# Altium PCB NUC972 DEV BOARD-2 20150128.PcbDoc (part 5 of 5)
Units mil, origin at the board's own origin, x right, y up, seen from the top; angles counter-clockwise.
Board outline 10236.22 x 7677.17 mil, 4 copper layers (Top, 2-GND, 3-POWER, Bottom), stack 35.4 mil thick; 572 components, 593 nets, 2369 pads, 1783 vias.
Unrouted connection lines stored in the file: 1277.
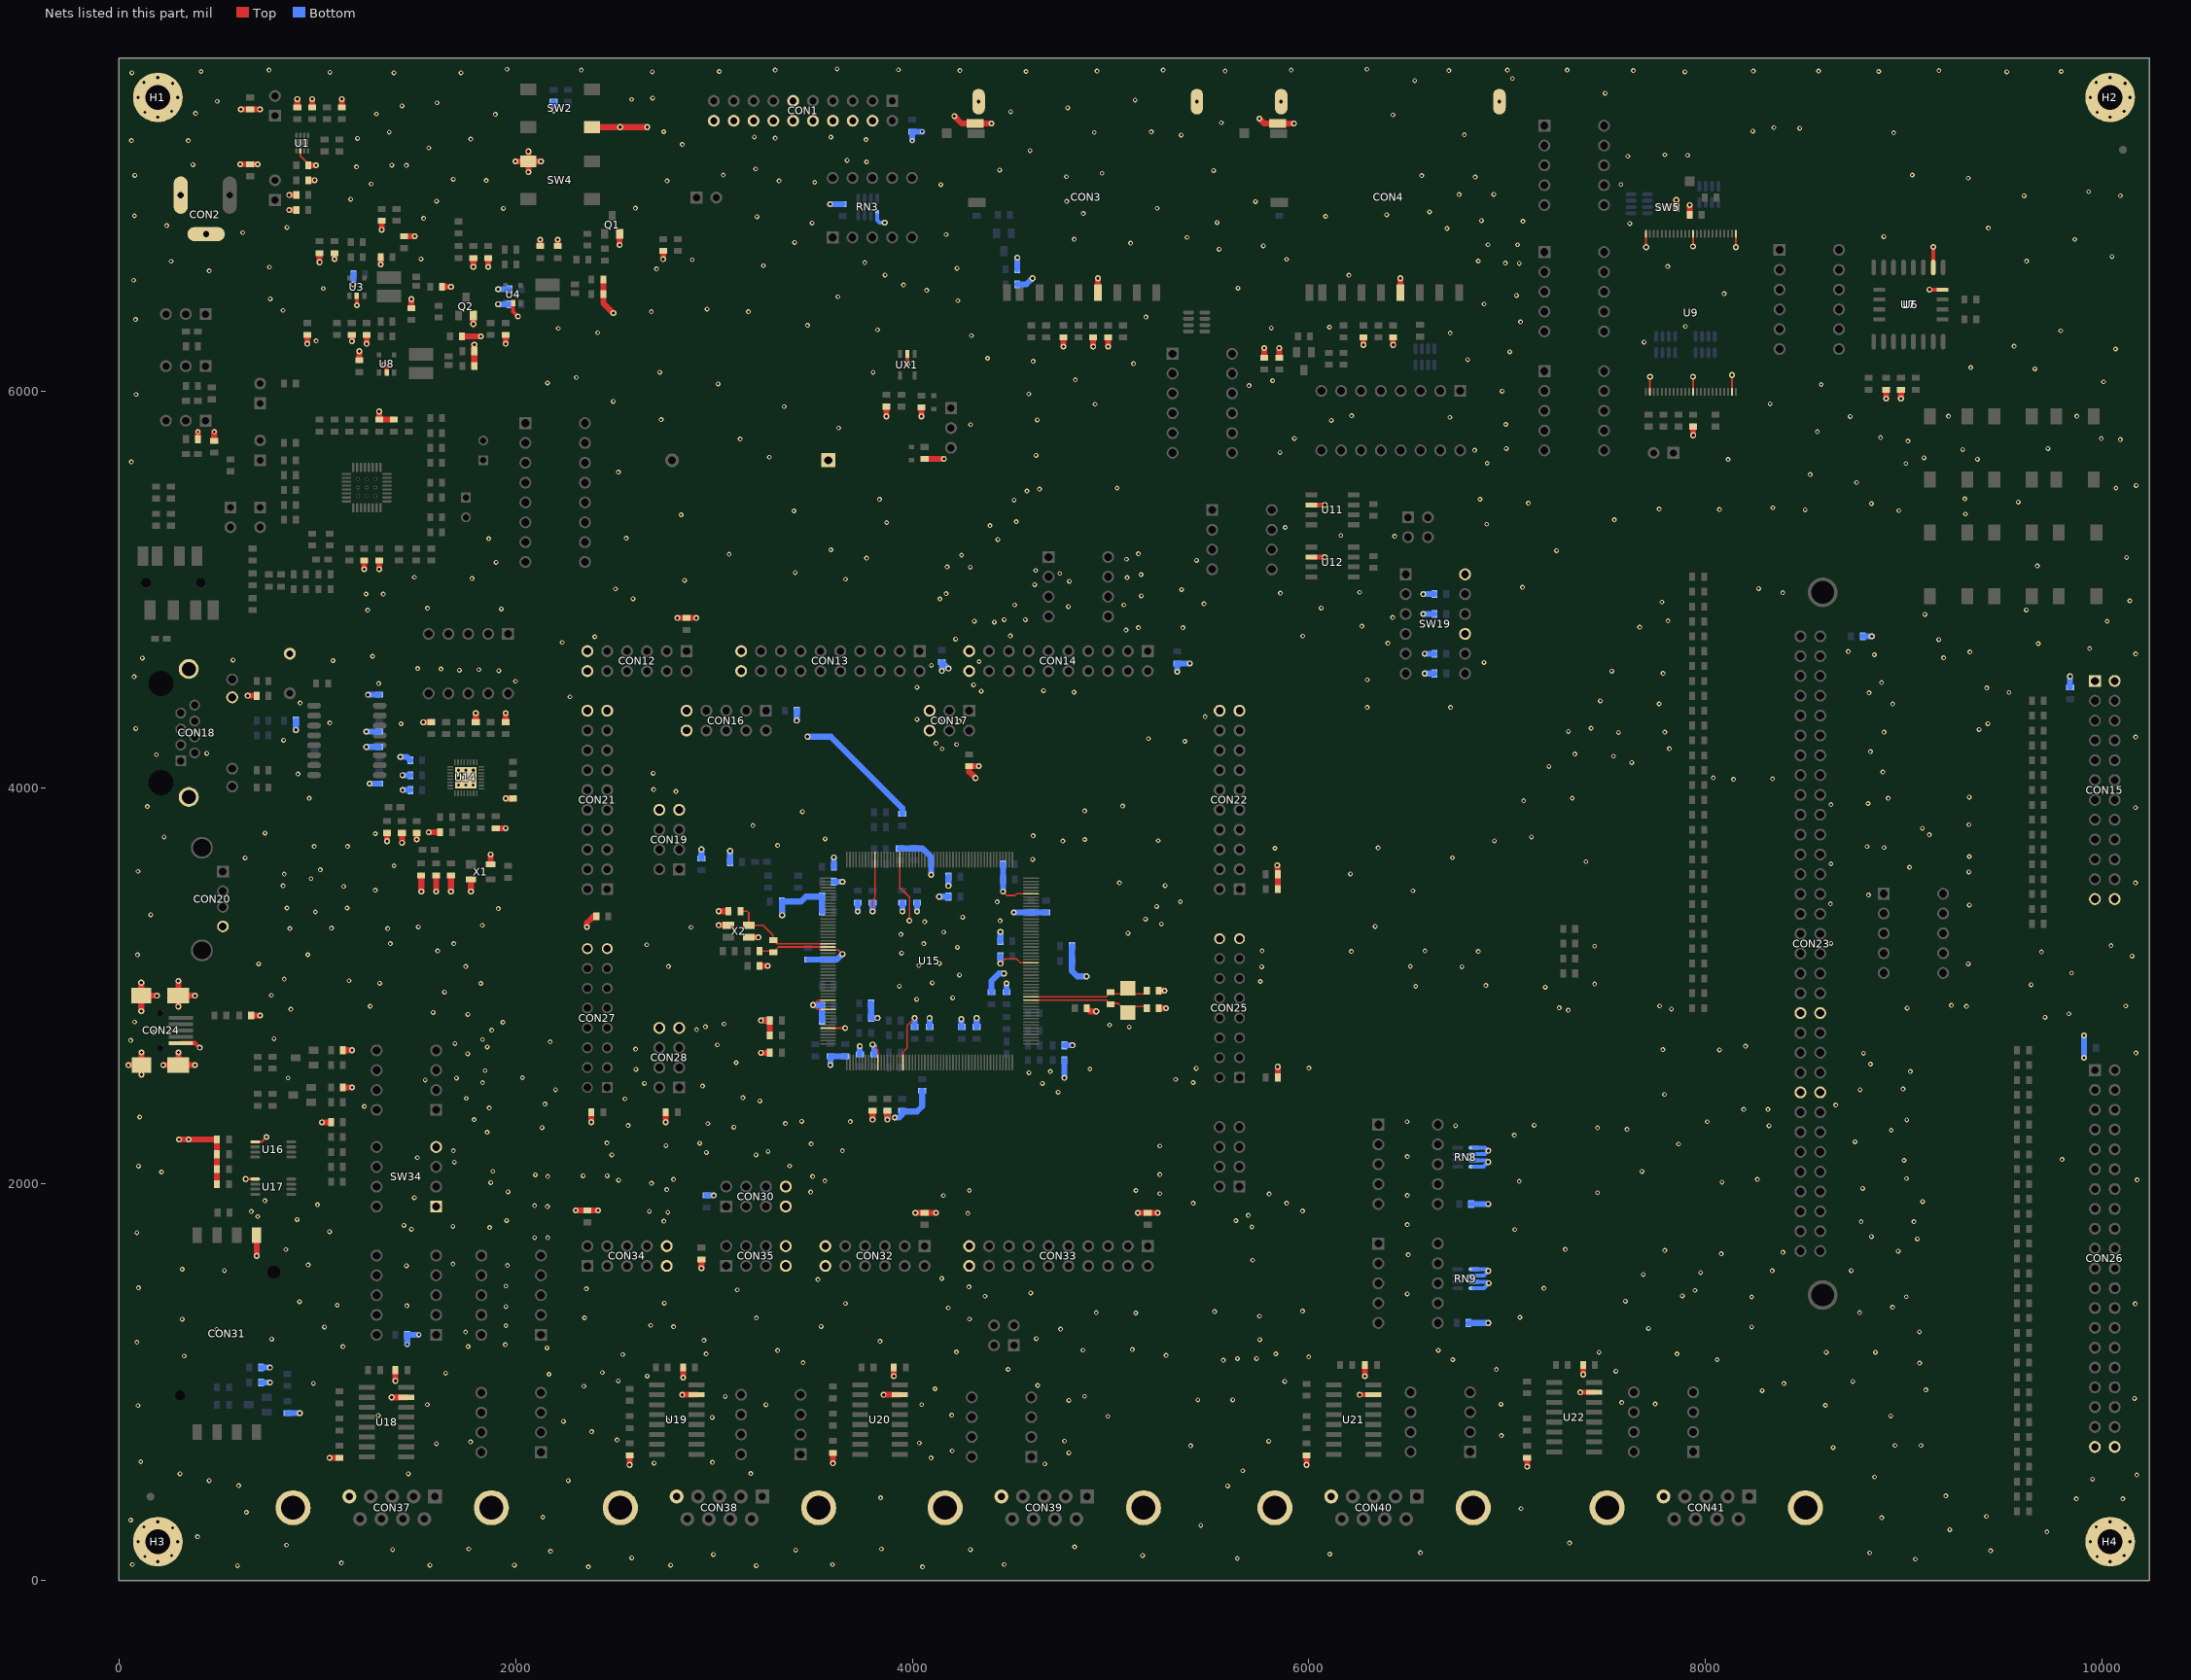
[diagram p7: the nets of this part, all layers, seen from the top]

## Via types
v1: diameter 24, hole 12, Top to Bottom, 1202 vias
v2: diameter 30, hole 16, Top to Bottom, 581 vias

## Nets (pads, with @x,y where several pads share a name; then routed paths per layer and width w, separated by ;. In a path a pad name is that pad's centre, name@x,y a point inside that pad or via, vN(x,y) a via of type N, cw(c..) or ccw(c..) an arc to the next point about the centre after c; other vN are vias at no path point) (continued)
VS: BT1.1 C1.2 C4.1 C5.2 C6.1 C8.2 C9.2 C10.2 C11.2 C12.2 C13.2 C28.2 C29.2 C30.2 C31.2 C32.2 C33.2 C34.2 C35.2 C37.2 C39.2 C41.2 C43.2 C45.2 C56.1 C57.1 C58.1 C59.1 C60.1 C61.2 C62.2 C63.2 C64.2 C65.2 C66.2 CB1.2 CB2.2 CB3.1 CB4.1 CB5.2 CB6.2 CB7.2 CB9.1 CB10.2 CB11.2 CB12.2 CB13.1 CB14.2 CB15.2 CB16.2 CB17.2 CB18.2 CB19.2 CB20.2 CB21.2 CB22.2 CB23.2 CB24.2 CB25.2 CB26.2 CB27.2 CB28.2 CB30.2 CB32.2 CB33.2 CB34.1 CB35.1 CBX1.1 CON1.4 CON1.6 CON1.8 CON1.10 CON1.11 CON1.12 CON1.14 CON1.16 CON1.18 CON1.20 CON2.2 CON2.3 CON3.3 CON3.12 CON3.13 CON3.14 CON4.3 CON4.12 CON4.13 CON4.14 CON12.11 CON12.12 CON13.19 CON13.20 CON14.19 CON14.20 CON15.1 CON15.2 CON15.23 CON15.24 CON16.9 CON16.10 CON17.5 CON17.6 CON18.11 CON18.13 CON18.14 CON19.7 CON19.8 CON20.4 CON21.19 CON21.20 CON22.19 CON22.20 CON23.39 CON23.40 CON23.47 CON23.48 CON24.5 CON24.6 CON24.7 CON24.8 CON24.9 CON25.15 CON25.16 CON26.39 CON26.40 CON27.15 CON27.16 CON28.7 CON28.8 CON30.7 CON30.8 CON31.5 CON32.11 CON32.12 CON33.19 CON33.20 CON34.9 CON34.10 CON35.7 CON35.8 CON37.5 CON37.10 CON37.11 CON38.5 CON38.10 CON38.11 CON39.5 CON39.10 CON39.11 CON40.5 CON40.10 CON40.11 CON41.5 CON41.10 CON41.11 CT1.2 CT2.1 CT3.1 CT4.1 CT5.2 CT6.2 CT7.2 CT8.2 CT10.2 CT11.2 CT12.2 CT13.2 CT14.2 CT15.1 CT17.2 CT18.2 CT19.1 CT20.2 CT23.1 CT29.1 CT30.1 CT31.2 CT32.2 CT33.2 CT34.2 CT35.1 CT36.1 CT37.1 CT38.1 CT39.1 CT40.1 CT41.2 CT42.1 CT43.1 CT44.1 CT45.1 CT46.1 CT47.1 CT48.1 CT49.1 CT50.1 CT51.1 CT52.1 CT54.2 CT55.1 CT56.2 CT57.2 CT60.1 CT62.1 CT63.1 CT64.1 CT65.1 CT66.2 CT68.1 CT69.2 CT70.2 CT71.2 CT72.2 CT76.2 CT77.2 CT78.2 CT79.2 CT80.2 CT81.2 CT82.2 CT83.2 CT84.2 CT85.2 CT86.2 CT87.2 CT88.2 CT91.1 CT92.2 CT94.2 CT95.2 CT96.1 CT97.1 CX1.2 H1.1 H1.2 H1.3 H1.4 H1.5 H1.6 H1.7 H1.8 H1.9 H2.1 H2.2 H2.3 H2.4 H2.5 H2.6 H2.7 H2.8 H2.9 H3.1 H3.2 H3.3 H3.4 H3.5 H3.6 H3.7 H3.8 H3.9 H4.1 H4.2 H4.3 H4.4 H4.5 H4.6 H4.7 H4.8 H4.9 LED2.2 LED7.2 LED9.2 Q1.E Q2.E R1.1 R3.2 R6.1 R9.1 R11.1 R21.1 R30.1 R43.2 R44.2 R56.2 R57.2 R64.2 R65.1 R68.1 R70.1 R77.1 R84.1 R85.2 R86.2 R100.1 R101.2 R102.2 R103.2 R104.2 R108.1 R109.2 R110.2 R111.2 R117.2 R118.2 R119.2 R120.2 RG1.1 RG2.1 RG3.1 RN3.7 RN8.2 RN8.4 RN8.6 RN8.8 RN9.2 RN9.4 RN9.6 RN9.8 RX2.1 SW2.4 SW4.4 SW5.3 SW19.9 SW19.12 SW34.1 SW34.4 U1.2 U3.2 U4.2 U6.4 U7.10 U8.2 U9.2 U9.13 U9.23 U9.25 U9.36 U9.48 U11.2 U12.2 U14.33 U15.11 U15.19 U15.81 U15.103 U15.145 U15.153 U15.186 U15.202 U15.205 U15.211 U16.1 U17.1 U18.15 U19.15 U20.15 U21.15 U22.15 UX1.2 X1.2 X1.4 X2.2 X2.4 | length 18240.2
  Top w8: U15.211@3575.69,2786.42 v2(3662.5,2786.42) ; U15.205@3575.69,2880.91 3522.24,2880.91 v2(3500,2903.15) 3525,2928.15 U15.202@3575.69,2928.15 ; U15.186@3575.69,3180.12 3627.88,3180.12 v2(3648,3160) ; v2(3800,2704) 3827.66,2676.34 U15.11@3827.66,2613.19 ; v2(3800,3375) 3800,3432 3811.91,3443.91 U15.153@3811.91,3636.81 ; U15.145@3937.89,3636.81 3937.89,3496 3985.89,3448 v2(3985.89,3328) ; U15.19@3953.64,2613.19 3953.64,2665.64 3975,2687 3975,2800 v2(4012.5,2837.5) ; v2(4445,3112) 4469,3136 4525.13,3136 4544,3117.13 U15.81@4599.31,3117.13 ; v2(4457.5,3475) 4476.5,3456 4517.42,3456 4525,3463.58 U15.103@4599.31,3463.58
  Top w10: v2(640,2025.5) U17.1@687.5,2025.5 ; U16.1@687.5,2213 720,2213 v2(744,2237) ; U1.2@915.16,7210.63 915.16,7186.5 955,7146.66 CT2.1@955,7137.5 ; v2(7700,6725) U9.48@7700,6792.62 ; U9.2@7719.69,5995.37 v2(7719.69,6072) ; U9.13@7936.22,5995.37 v2(7936.22,6072) ; v2(7936.22,6728) U9.36@7936.22,6792.62 ; U9.23@8133.07,5995.37 v2(8133.07,6080) ; v2(8152.76,6725) U9.25@8152.76,6792.62
  Top w20: CON24.5@312.2,2711.81 384,2711.81 v2(407.81,2688) ; v2(1200,6432) U3.2@1200,6479.97 ; v1(1336,6134) 1350,6120 U8.2@1350,6092.47 ; U4.2@1987.5,6442.47 1987.5,6400 v2(2012.5,6375) ; v2(3975.1,6136) UX1.2@3975.1,6187.5 ; v2(9129,6511) U6.4@9194.5,6511 ; U7.10@9147.5,6622.52 v2(9147.5,6725.5)
  Top w25: U12.2@6012.5,5162.5 v2(6080,5162.5) ; U11.2@6012.5,5425 v2(6080,5425) ; v2(6256,937.5) U21.15@6325,937.5 ; v2(7368,950) U22.15@7437.5,950
  Top w30: v2(48,2599.61) CON24.6@114.17,2599.61 ; v2(113.39,2872) CON24.8@113.39,2950 ; v2(113.39,3016) CON24.8@113.39,2950 ; v2(114.17,2552) CON24.6@114.17,2599.61 ; v2(114.17,2664) CON24.6@114.17,2599.61 ; v2(192,2950) CON24.8@113.39,2950 ; v2(224,2600) CON24.7@300.39,2600 ; v2(300,2896) CON24.9@300,2950 ; v2(300,3024) CON24.9@300,2950 ; v2(300.39,2664) CON24.7@300.39,2600 ; v2(304,2225.5) v2(352,2225.5) CT43.1@495,2225.5 CT44.1@495,2150.5 CT45.1@495,2075.5 CT46.1@495,2000.5 ; v2(384,2600) CON24.7@300.39,2600 ; v2(384,2950) CON24.9@300,2950 ; CT23.1@398.75,5756.25 v1(398.75,5793.75) ; CBX1.1@481.25,5748.75 v1(481.25,5793.75) ; v2(612.5,7142.5) C1.2@662.5,7142.5 v2(700,7142.5) ; v2(616,7420) CT1.2@662.5,7420 v2(712,7420) ; v2(650,4462.5) R64.2@695,4462.5 ; R84.1@667.5,2850 v2(712.5,2850) ; v2(695,1638) CON31.5@695,1742 ; v2(859,6912.5) CT4.1@895,6912.5 ; v2(859,6987.5) CT3.1@895,6987.5 ; CB1.2@900,7430 v2(900,7472) ; v2(950,6237.5) C8.2@950,6282.5 ; R6.1@955,7062.5 v2(987,7062.5) ; CT2.1@955,7137.5 v2(995,7137.5) ; R1.1@975,7430 v2(975,7472) ; v2(1012.5,6649) R9.1@1012.5,6695 ; v2(1024,2312) CT42.1@1070,2312 ; v2(1062.5,620) C56.1@1112.5,620 ; v2(1087.5,6665) C4.1@1087.5,6695 ; R3.2@1125,7430 v2(1125,7472) ; LED9.2@1130,2487.5 v2(1176,2487.5) ; LED7.2@1130,2675 v2(1176,2675) ; v2(1175,6250) C9.2@1175,6282.5 ; C13.2@1212.5,6155 v2(1212.5,6200) ; v2(1237.5,5101) R56.2@1237.5,5145 ; v2(1250,6237.5) R21.1@1250,6282.5 ; v2(1312.5,5101) R57.2@1312.5,5145 ; v2(1312.5,5896) R43.2@1312.5,5855 R44.2@1387.5,5855 ; v2(1320,6637.5) CT7.2@1320,6675 ; v2(1325,6812.5) LED2.2@1325,6857.5 ; v2(1352.5,3729.5) CT31.2@1352.5,3771 ; v2(1376,925) U18.15@1450,925 ; v2(1395,1008) C37.2@1395,1062.5 ; v2(1427.5,3721.5) CB9.1@1427.5,3771 ; CT5.2@1437.5,6780 v2(1492,6780) ; CT13.2@1475,6417.5 v2(1475,6462.5) ; v2(1502.5,3737.5) CT32.2@1502.5,3771 ; CT33.2@1524.5,3557 1525,3557 v2(1525,3475) ; v2(1535,4329.5) R65.1@1575,4330 ; v2(1562.5,3775) C30.2@1620,3775 ; CT34.2@1599.5,3557 1600,3557 v2(1600,3475) ; CT11.2@1630,6525 v2(1675,6525) ; C31.2@1674.5,3557 1675,3557 v2(1675,3475) ; v2(1712.5,4012.5) v2(1749.5,4049.5) ; v2(1712.5,4049.5) v2(1749.5,4049.5) ; v2(1712.5,4086.5) v1(1730,4069) v2(1749.5,4049.5) ; CT14.2@1730,6275 v2(1825,6275) ; v2(1749.5,4012.5) v2(1749.5,4049.5) ; v2(1749.5,4087.5) v2(1749.5,4049.5) ; v2(1775,3475) X1.2@1775,3537.7 ; v2(1786.5,4012.5) v2(1749.5,4049.5) ; v2(1787.4,6337.5) Q2.E@1787.4,6379.72 ; v2(1787.5,4049.5) v2(1749.5,4049.5) ; v2(1787.5,4087.5) v2(1749.5,4049.5) ; v2(1787.5,6625) C5.2@1787.5,6670 ; CT18.2@1792.5,6125 CT17.2@1792.5,6200 v2(1792.5,6233) ; R68.1@1800,4330 v2(1800,4375) ; v2(1862.5,6625) R11.1@1862.5,6670 ; X1.4@1875,3612.5 v2(1875,3662.5) ; R77.1@1900,3795 v2(1950,3795) ; v2(1950,3945) C29.2@1987.5,3945 ; R70.1@1950,4330 v2(1950,4375) ; v2(1950,6237.5) C10.2@1950,6282.5 ; v2(2000,7157.19) SW4.4@2065.16,7157.19 ; v2(2065.16,7104) SW4.4@2065.16,7157.19 ; v2(2065.16,7208) SW4.4@2065.16,7157.19 ; CT6.2@2125,6730 v2(2125,6762.5) ; v2(2128,7157.19) SW4.4@2065.16,7157.19 ; CT8.2@2212.5,6730 v2(2212.5,6762.5) ; v2(2304,1867.5) CT47.1@2362.5,1867.5 v2(2416,1867.5) ; v2(2360,3296) 2360,3318 2392,3350 CT37.1@2407.5,3350 ; v2(2382.5,2312.5) CT39.1@2382.5,2362.5 ; SW2.4@2384.84,7330.31 v2(2528,7330.31) v2(2664,7330.31) ; CT10.2@2442.5,6562.5 CT12.2@2442.5,6487.5 2442.5,6443.75 v2(2493.75,6392.5) ; v2(2524.9,6736) Q1.E@2524.9,6792.22 ; v2(2575,584) C57.1@2575,632.5 ; v2(2744,6664) C6.1@2744,6706 ; v2(2757.5,2312.5) CT40.1@2757.5,2362.5 ; v2(2816,4855) CT29.1@2862.5,4855 v2(2912,4855) ; v2(2840,937.5) U19.15@2912.5,937.5 ; v2(2845,1024) C39.2@2845,1075 ; v2(2937.5,1576) CT50.1@2937.5,1620 ; v2(3024,3305.51) X2.2@3072.83,3305.51 ; v2(3024,3376) C32.2@3074,3376 ; X2.4@3177.17,3244.49 v2(3224,3244.49) ; C33.2@3230,3100 v2(3272,3100) ; v2(3237.5,2662.5) R86.2@3282.5,2662.5 ; v2(3237.5,2825) R85.2@3282.5,2825 CB11.2@3282.5,2750 ; v2(3600,592) C58.1@3600,645 ; v2(3800,2325) CT41.2@3800,2370 ; v2(3856,937.5) U20.15@3937.5,937.5 ; v2(3870.5,5872) RX2.1@3870.5,5920.5 ; v2(3875,2325) CB12.2@3875,2370 ; v2(3907.5,1032) C41.2@3907.5,1075 ; v2(4016,1855) CT48.1@4062.5,1855 v2(4120,1855) ; v2(4046,5872) CX1.2@4046,5916.5 ; CB7.2@4062.5,5657.5 v2(4160,5657.5) ; v2(4212.5,7386.02) 4250,7348.52 CON3.12@4317.22,7348.52 v2(4400,7348.52) ; v2(4319.5,4048) 4287.5,4080 CT30.1@4287.5,4107.5 v2(4336,4107.5) ; v2(4762.5,6224) C11.2@4762.5,6270 ; CB10.2@4880,2887.5 4896,2871.5 v2(4928,2871.5) ; v2(4912.5,6224) CB3.1@4912.5,6270 ; CON3.3@4936.32,6496.16 v2(4936.32,6568) ; v2(4987.5,6224) CB4.1@4987.5,6270 ; v2(5137.5,1855) CT49.1@5187.5,1855 v2(5237.5,1855) ; C35.2@5242.5,2887.5 v2(5280,2887.5) ; C34.2@5242.5,2975 v2(5272,2975) ; v2(5750,7373.52) 5775,7348.52 CON4.12@5842.22,7348.52 v2(5925,7348.52) ; CT19.1@5775,6167.5 v2(5775,6216) ; v2(5840,3608) CT35.1@5842.5,3562.5 CT36.1@5842.5,3487.5 ; CT38.1@5842.5,2537.5 v2(5842.5,2592) ; R30.1@5850,6167.5 v2(5850,6216) ; v2(5987.5,584) C59.1@5987.5,632.5 ; v2(6275,6232) C12.2@6275,6270 ; v2(6282.5,1032) C43.2@6282.5,1087.5 ; v2(6425,6232) CT15.1@6425,6270 ; CON4.3@6461.32,6496.16 v2(6461.32,6568) ; v2(7100,576) C60.1@7100,620 ; v2(7382.5,1040) C45.2@7382.5,1087.5 ; SW5.3@7852.5,6925 v2(7852.5,6962.5) ; CB2.2@7920,6887.5 v2(7920,6937.5) ; v2(7937.5,5776) CB6.2@7937.5,5820 ; v2(8910,5961) CT20.2@8910,6006 ; v2(8985,5961) CB5.2@8985,6006
  Bottom w20: RN3.7@3824,6886.5 3824,6861.5 3836.5,6849 v2(3861.5,6849) ; RN9.8@6832,1475 6882,1475.6 v2@6904.2,1497.8 ; RN9.6@6832,1507 6894.4,1507.6 v2@6904.2,1497.8 ; RN9.4@6832,1539 6882,1539.6 v2(6904.8,1562.4) 6894.4,1571.6 RN9.2@6832,1571 ; RN8.8@6832,2087.5 6880,2087.5 v2(6904,2111.5) 6896,2119.5 RN8.6@6832,2119.5 ; RN8.4@6832,2151.5 6888,2151.5 v2(6904.5,2168) 6904,2168 6888.5,2183.5 RN8.2@6832,2183.5 ; v2(6906.8,1500.4) v2@6904.2,1497.8
  Bottom w30: CT97.1@717.5,1000 v2(762.5,1000) ; CB34.1@717.5,1075 v2(762.5,1075) ; CB35.1@850,845 v2(912.5,845) ; v2(892.5,4290) C63.2@892.5,4337.5 ; v2(1182.5,6537) CT54.2@1182.5,6587.5 ; v2(1248,4205) C65.2@1312.5,4205 ; v2(1248,4282.5) C64.2@1312.5,4282.5 ; v2(1256,4467.5) C62.2@1312.5,4467.5 ; v2(1264,4020) C66.2@1312.5,4020 ; v2(1420,4155) 1451.5,4155 R108.1@1469.5,4137 ; v2(1430,4062) CB13.1@1469.5,4062 ; v2(1431,3987) CT66.2@1469.5,3987 ; v1(1454,1192) R120.2@1454,1240 v1(1512,1240) ; v2(1912.5,6437.5) CT57.2@1970,6437.5 ; v2(1912.5,6512.5) CT56.2@1970,6512.5 ; v2(2192,7416) C61.2@2192,7458 ; CT68.1@2937.5,3642.5 v2(2937.5,3687.5) ; CT96.1@2962.5,1942.5 v2(3000,1942.5) ; CT69.2@3082,3624 v2(3082,3680) ; v2(3237.5,2825) CT86.2@3282.5,2825 ; RG1.1@3342.5,3425 RG1.1@3344,3425 ; v2(3344,3356) RG1.1@3344,3425 ; v2(3417.5,4337.5) CT65.1@3417.5,4387.5 ; v2(3472,4256) 3590,4256 3950,3896 R109.2@3950,3867.5 ; CT82.2@3475,3132.5 CB22.2@3550,3132.5 3620.5,3132.5 v2(3648,3160) ; v2(3500,2903.15) 3541.85,2903.15 CT83.2@3545,2900 CB25.2@3545,2825 ; CT76.2@3545,3375 CB17.2@3545,3450 3464,3450 3439,3425 RG1.1@3344,3425 ; v2(3586.5,6941.5) CT52.1@3649,6941.5 ; v2(3587.5,2600) CT92.2@3587.5,2645 CB30.2@3662.5,2645 ; CB15.2@3605,3525 v2(3648,3525) ; CT70.2@3605,3600 v2(3605,3648) ; v2(3725,3375) CB18.2@3725,3420 ; CT94.2@3736,2654 v2(3736,2696) ; CT84.2@3792.5,2912.5 CB26.2@3792.5,2837.5 v2(3825,2837.5) ; v2(3800,2704) 3808,2696 CB32.2@3808,2654 ; v2(3800,3375) CT77.2@3800,3420 ; v2(3875,2325) CT95.2@3875,2370 ; v2(3912,2336) 3934,2336 3950,2352 CB33.2@3950,2366 ; CB14.2@3937.5,3692.5 CT71.2@4012.5,3692.5 4051.5,3692.5 4096,3648 v2(4096,3560) ; CB33.2@3950,2370 CB33.2@3950,2366 ; v2(3950,3375) CB19.2@3950,3420 ; v1(4000,7262.5) CT51.1@4000,7307.5 v1(4050,7307.5) ; CB27.2@4012.5,2792.5 v2(4012.5,2837.5) ; v2(4025,3375) CT78.2@4025,3420 ; R117.2@4050,2470 4050,2392 4024,2366 CB33.2@3950,2366 ; CT87.2@4087.5,2792.5 v2(4087.5,2837.5) ; v2(4136,3450) R111.2@4182.5,3450 ; v2(4150,4587.5) CT62.1@4150,4632.5 v2(4182.5,4600) ; v2(4182.5,3504) R110.2@4182.5,3550 ; v2(4248,2832) 4248,2792.5 CT88.2@4250,2792.5 ; CB28.2@4325,2792.5 v2(4325,2837.5) ; CT85.2@4400,2967.5 4400,3025 4437.5,3062.5 v2(4462.5,3062.5) ; v2(4445,3112) CT80.2@4445,3150 ; CB21.2@4445,3225 v2(4445,3272) ; v2(4457.5,3475) CB16.2@4457.5,3537.5 CT72.2@4457.5,3612.5 ; CB24.2@4475,2967.5 v2(4475,3012.5) ; v2(4512.5,3370) CB20.2@4600,3370 CT79.2@4675,3370 ; R100.1@4530,6537.5 4576,6537.5 v2(4606.5,6568) ; CT55.1@4530,6612.5 v2(4530,6672) ; v2(4767.5,2536) RG3.1@4767.5,2625 ; RG2.1@4767.5,2700 v2(4808,2700) ; CT81.2@4805,3200 CB23.2@4805,3125 4805,3075 4832,3048 v2(4879,3048) ; v2(5336,4584) CT63.1@5336,4626 v2(5400,4626) ; v2(6576,4875) R102.2@6632.5,4875 ; v2(6576,4975) R101.2@6632.5,4975 ; v2(6584,4575) R104.2@6632.5,4575 ; v2(6584,4675) R103.2@6632.5,4675 ; R119.2@6805,1300 v2(6904,1300) ; R118.2@6817.5,1900 v2(6904,1900) ; CT60.1@8792.5,4762.5 v2(8837.5,4762.5) ; CT64.1@9837.5,4505 v2(9837.5,4560) ; v2(9907.5,2637.5) CT91.1@9907.5,2687.5 v2(9907.5,2750)
  other v1: 2367.36,70.31 4052.05,70.31 598.57,75.92 3213.91,75.92 1568.46,78.72 1994.54,78.72 2782.22,78.72 68.78,81.53 3597.94,81.53 4464.11,81.53 1122.76,89.94 9057.43,108.28 5638.91,112.23 2586,115.16 5161.34,127.71 2998.07,131.98 6104.9,134.28 8827.07,140.18 6562.29,140.81 2176.75,148.8 9436.63,150.81 3412.93,154.41 1380.65,157.21 4293.12,157.21 1764.68,160.01 3844.62,160.01 4818.55,170.34 845.25,179.64 7313.82,189.79 396.75,221.68 9720.14,246.5 9231.08,257.13 5454.86,279.67 60.37,305.78 8887.32,317.38 2137.91,320.58 9415.36,324.46 643.42,345.02 7069.29,363.45 9868.99,413.06 10102.88,413.06 3840.65,417.67 9210.82,427.91 5589.91,478.15 604.06,479.58 455.61,504.8 2266.15,505.23 9950.5,512.29 8851.88,522.92 10173.76,533.55 309,539.05 1459.75,539.39 3186.08,540.99 5665.89,554.82 4668.19,589.08 2699.13,593.02 2992.55,597.18 110.83,600.11 4095.34,618.85 4789.46,644.77 4201.86,655.29 8642.79,671.77 5404.41,680.52 8954.65,682.4 9085.78,682.4 1601.11,691.45 4036.47,694.53 1773.83,699.77 4768,704 5797.02,703.66 2512.54,709.73 6970.06,732.01 2383.91,751.08 2241.56,804.13 2768,808 2992,824 4986.74,829.08 8933.39,831.24 1307.36,833.58 4199.05,834.69 96.81,883.23 8603.8,884.4 1555.43,887.84 3262.5,887.5 4047.68,887.95 6968.51,889.61 7745.51,891.6 7576.95,898.28 4789.46,909.41 5440,912 5616,912 10162.09,919.21 3057.1,929.33 4869,930 8284.85,958.83 9110.59,962.37 4115.09,967.69 2344.71,981.11 4633.15,984.92 8394.71,994.26 980.95,995.56 5878.53,1004.9 8742.02,1004.9 2517.9,1007.89 2664,1032 2168.73,1041.36 1647.76,1046.85 2437.5,1050 7547.82,1056.44 6945.25,1065.14 4483.38,1065.77 9078.69,1097.04 3449.49,1099.45 5568,1112 6725.53,1114.76 8058.04,1114.76 5640,1120 5736,1120 5999.02,1128.93 329.63,1133 5280,1136 2541.09,1140.62 2960.69,1143.59 5832.6,1144.21 7856,1144 7462.5,1151.72 8608,1152 8856,1152 4222.91,1153.91 3321.19,1160.45 6652.2,1162.21 4860.6,1162.66 5110.08,1165.46 2159.02,1173.94 1129.7,1180.22 1760.87,1181.08 1948.34,1190.01 91.21,1202.78 3837.45,1207.51 2950,1212.5 5752,1216 770.69,1217.94 4625.2,1220.85 1748.37,1254.29 9077.81,1254.69 492.98,1266.95 4747.92,1268.36 7712,1272 1036.39,1279.61 8232,1280 2796.43,1281.07 3540.97,1282.41 1951.91,1286.42 2681.57,1287.64 319.83,1319.22 4288.75,1319.63 3214.26,1324.88 2348.28,1325.7 7064,1328 5751.1,1334.43 5126.91,1350.04 4928,1352 8776.29,1351.88 5524.34,1356.86 5967.9,1359.35 4182.23,1375.7 8942.53,1379.17 1951.91,1382.84 1452.54,1386.76 1101.18,1389.25 10165.36,1396.2 3663.65,1398.12 2750,1400 911.17,1407.44 7595.35,1409.18 8232.28,1430.93 9011.54,1432.37 4367.24,1434.56 7882.02,1436.27 6496.18,1446.57 4597.64,1451.32 7946.16,1464 3117.81,1466.75 2357.21,1472.11 7184.53,1474.65 99.61,1477.49 4285.95,1482.22 1951.91,1486.39 3524.99,1518.69 4148.6,1524.26 7685.64,1544.62 7974.92,1554.58 8335.79,1563.21 532.19,1564.26 8733.93,1563.69 319.83,1570.79 1450.04,1588.61 1959.06,1589.95 954.48,1592.61 1684.61,1597.59 5716.21,1616.02 6501.17,1643.43 8078.55,1648.41 8390.04,1655.89 8970.56,1661.9 7794.48,1665.86 842.34,1669.86 7292.88,1671.03 9067.85,1723.17 2162.6,1729.21 2096.53,1731 8836.1,1735.63 91.21,1755 1063.02,1759.83 7037.8,1770.35 1475.29,1772.03 1869.78,1780.99 5712,1784 1684.61,1786.98 1437.91,1791.96 6496.18,1795.44 8783.77,1810.39 9050.4,1810.39 2748.22,1813.13 5632,1816 1955.48,1816.7 898.88,1821.39 700.3,1836.82 5694.5,1842 4280.34,1852.23 2767.86,1857.77 667.91,1861.74 2675.02,1863.12 5968,1864 2160.81,1886.33 2096.53,1891.69 1001.78,1896.56 5416,1904 5888,1904 9093.96,1912.09 736.68,1915.98 1490.24,1931.51 4157.01,1941.93 6496.18,1942.46 5800,1950 5248,1952 7454.91,1956.7 3488,1960 1962.63,1961.32 4288,1968 5128,1968 2762.5,1972.03 8791.42,1978.47 2685.73,2004.17 1875.14,2007.74 8082.64,2010.07 7060.38,2014.13 3560,2016 2519.68,2020.24 10175.63,2021.01 2796.43,2023.81 8260.96,2023.62 9012.64,2028.13 2162.6,2038.09 3498.11,2038.09 2341.14,2041.67 2462.55,2041.67 2100.1,2047.02 5248,2048 215.93,2060.98 7678.59,2064.25 1885.85,2064.88 99.61,2091.38 3382.05,2091.66 1692.08,2110.93 9000,2120 9797.09,2123.88 1505.19,2133.36 6496.18,2139.32 2485.76,2147.01 3212.44,2147.01 2962.47,2159.5 3273.14,2164.86 1687.1,2168.24 3648,2168 5248,2192 2758.2,2193.77 3490.96,2202.36 7863.68,2201.94 2928.55,2205.93 2460.76,2207.71 8753.05,2213.23 7035.55,2246.63 1857.28,2261.27 8936,2272 7604.1,2276.43 7454.91,2283.41 2134.03,2284.49 3101.06,2287.32 6739.51,2294.21 8319.65,2294.49 2567.84,2296.05 7135.69,2296.7 2969.55,2304.91 3360.63,2305.91 3688.11,2315.27 6495,2315 8008.15,2314.8 3442.76,2316.62 9014.27,2324.25 1791.22,2325.55 105.22,2338.06 8192.16,2376.44 8314.25,2376.44 1868,2384.47 1237.71,2391.88 8655.62,2398.86 2148.31,2404.11 3232.28,2419.86 2551.93,2429.92 1751.94,2432.68 3146.12,2435.77 7792.86,2451.85 4736,2464 2201.88,2475.53 8778.78,2475.73 8995.58,2479.53 2942.49,2494.28 2650.02,2507.67 4655.97,2508.17 1834.07,2511.24 5416,2512 1545.06,2524.59 5328,2528 1702.05,2534.56 853.7,2535.58 2035.23,2536.58 4588.69,2561.43 4696,2568 9032,2568 1846.57,2571.94 2607.17,2579.08 4895.66,2580.75 5432,2584 6000,2585 8831.11,2605.31 3112.5,2612.5 1759.09,2657.64 8796.23,2660.13 10169.11,2661.36 8069.63,2676.59 7784.53,2678.67 2605.39,2680.85 1857.28,2691.57 8200.68,2695.7 3017.82,2702.28 1694.58,2708.99 2174.65,2717.63 60.37,2724.89 1834.07,2729.06 782.39,2732.96 175.3,2764.14 1880,2776 2912.48,2779.05 5094.58,2792.04 2957.12,2793.34 4995.15,2802.5 3051.75,2807.62 1936,2816 79.99,2817.4 9710.75,2841.41 1759.87,2856.03 9831.25,2859.13 1584.93,2865.98 7307.29,2877.12 867.36,2881.68 7827.56,2882.99 9016.15,2887.48 7262.27,2889.18 9314.83,2896.04 1267.45,2897.07 7767.92,2898.16 10118.31,2898.11 9239.41,2901.65 4022.43,2931.56 4204.02,2939.51 769.36,2952.16 1641.89,2968.88 7191.51,2993.23 6538.09,2997.39 3934.95,2997.83 6891.85,3001.55 9641.28,3005.63 7440.6,3009.07 1825.35,3012.24 1315.04,3012.58 4100.63,3015.06 5755.08,3022.07 1160.87,3025.61 834.16,3033.93 4238.48,3054.83 9845.42,3064.68 5761.58,3095.73 6771.16,3095.73 1749.37,3097.51 2771.01,3097.71 6511.18,3097.89 4033.03,3102.54 705.33,3110.77 9323.5,3110.53 4136.42,3113.15 10150.2,3149.73 94.01,3156.58 952.78,3156.71 3946.88,3164.84 9693.03,3170.99 6214.37,3173.72 6853.48,3173.72 1607.71,3176.2 5763.74,3175.89 6584.84,3175.89 4227.87,3194 7440.6,3199.72 10043.88,3202.89 2661.69,3207.03 1369.44,3212.64 1689,3212.64 4058.22,3212.56 8631.74,3213.97 3942.9,3258.95 5087.65,3265.02 4158.95,3270.88 862.07,3288.32 1355.42,3288.32 1072.31,3291.13 2885.39,3295.57 1509.6,3296.73 6334.52,3299.33 1831.96,3305.14 5256,3312 4063.52,3322.57 4442.75,3327.95 5176,3336 4254.38,3346.43 161.28,3358.4 991.01,3372.42 1913.25,3389.24 848.05,3392.04 1150.79,3392.04 5232,3400 9330,3407.33 8629.25,3413.3 4428.18,3423.67 5352,3424 8821.11,3458.16 6524.01,3479.02 1292.71,3482.27 1133.98,3501.36 828.43,3504.17 5274.94,3505.22 5044.68,3519.38 10166.94,3519.3 968.59,3540.61 834.04,3563.03 6208.78,3564.18 9327.7,3574.15 96.81,3577.05 1016.24,3585.46 9028.65,3597.96 1388.15,3605.54 8631.74,3615.13 7396.33,3626.04 4607.68,3637.99 637.3,3645.46 6723.3,3645.64 9329.28,3651.92 5828.74,3693.68 6348.69,3695.84 8899.99,3697.28 8813.63,3702.34 985.41,3703.19 1153.6,3703.19 3321.8,3708.25 4759.59,3729.55 6935.67,3730.58 5240.29,3731.63 4869.88,3737.88 3561.03,3740.65 7121.89,3750.19 228.56,3750.84 4609.76,3756.61 9127.92,3761.56 1292.71,3767.24 737.19,3770.32 9092.81,3794.76 3197.2,3807.93 9327.01,3812.56 3446.4,3877.7 4869.88,3881.46 10166.94,3898.29 144,3904 5060.59,3906.22 8631.74,3914.13 8818.61,3919.12 7082.69,3933.14 960.2,3945.32 7327.72,3946.21 8920.3,3945.58 9328.45,3952.02 2808.47,3979.87 2696.33,3989.84 8140.87,4041.21 8337.72,4043.7 8038.72,4048.69 903.67,4067.9 2693.84,4072.07 8893.29,4077.84 7210.1,4106.3 7627.59,4125.93 7536.09,4158.22 189.32,4165.71 7340.79,4168.38 443.29,4172.4 8831.07,4180.75 4150.63,4194.86 7816.96,4195.7 4223.77,4216.94 4120.27,4222.46 5374.81,4232.93 831.24,4238.59 5190.41,4246.46 10167.8,4254.71 7560.31,4277.92 7794.12,4278.92 8900.06,4278.74 7308.12,4282.73 9378.6,4292.28 85.6,4297.46 7422.47,4299.06 1422.96,4321.26 9423.16,4321.59 1063.9,4325.49 4140.97,4335.62 4237.57,4335.62 4023.68,4343.9 5476.78,4357.79 6293.86,4403.75 6714.21,4403.75 8942.95,4420.94 7765.57,4421.61 913.97,4426.27 7468.76,4436.78 2274.86,4457.24 8823.6,4477.26 9528.85,4479.24 4815.75,4480.51 4347.96,4486.03 4662.58,4488.79 9416.98,4502.21 4023.68,4505.35 4309.32,4517.77 1310.57,4524.51 8886.52,4529.29 2000.15,4535.72 6293.86,4543.17 77.19,4558.15 7785.07,4575.43 7527.26,4586.27 1916.05,4588.98 1717.03,4591.79 1815.14,4594.59 1624.53,4597.39 1506.79,4600.2 4096.81,4615.74 6882.77,4630.57 4336.92,4635.06 1080,4640 576.27,4642.53 118.88,4652.33 9199.92,4653.67 1279.74,4661.87 8850.4,4669.24 10168.22,4673.59 9331.99,4683.57 8718.98,4686.06 9936.15,4700.85 9676.56,4725.68 6398.17,4727.88 2235.61,4731.94 9175.45,4745.99 4218.25,4748.21 2400,4760 5968.68,4763.93 4494.23,4764.77 5077.94,4793.75 5140.04,4806.17 5364.58,4805.95 7667.39,4808.17 6267.07,4813.2 4414.2,4833.77 4313.46,4839.29 10024.18,4838.54 7810.61,4840.57 4463.87,4846.19 4570.13,4846.19 6422.33,4857.58 9105.23,4872.96 1254.51,4894.53 9616.53,4895.12 1928.48,4900.2 1556.03,4904.18 6062.32,4905.44 4787.5,4912.5 4516.31,4920.7 5066.9,4920.7 5471.33,4926.25 7779.52,4935.26 10138.82,4941.49 4139.59,4951.06 2592,4952 5155.21,4966.24 1333.23,4975.29 1246.1,4975.82 4171.33,4977.28 5856.31,4980.35 8388.96,4982.87 6255.85,4984.51 5358.04,4998.7 2504.12,5001.46 8267.06,5003.19 7076.92,5009.1 4617.04,5022.82 4792,5040 2852.1,5045.14 3663.52,5050.42 1780.82,5053.7 5083.46,5058.7 1490.05,5060.23 5153.83,5073.88 4744,5080 3410.31,5084.08 4622.56,5094.58 4292.76,5111.13 4175.47,5112.51 9672.07,5117.29 1901.71,5135.38 5433.19,5145.72 5080.7,5151.15 3769.77,5156.67 10122.48,5160.39 4248.6,5171.85 3077.05,5175.92 5140.04,5178.75 7248.47,5194.2 3589.99,5198.79 4432.13,5250.51 1864.84,5254.86 2558.06,5257.5 6432.18,5266.62 6160.94,5271.01 5880.79,5311.68 4392.12,5320.88 6896.34,5327.38 3870.96,5336.01 4524.59,5340.2 7539.66,5349.95 2835.28,5375.22 9309.56,5378.82 3403.76,5394.82 8974.01,5396.36 8501.82,5400.47 8070.12,5401.87 7765.39,5404.12 8338.74,5410.9 8835.8,5431.8 7106.27,5433.47 9576.13,5439.86 4513.55,5449.22 3835.02,5453.63 6862.48,5453.78 9307.07,5456.07 4578.41,5494.75 4641.88,5504.41 5033.34,5510.16 10068.48,5510.03 10170.62,5522.68 8761.41,5538.16 8527.46,5578.18 2518.85,5590.74 9009.45,5633.8 6898.56,5635.26 63.33,5642.26 8113.24,5654.24 9370.41,5655.35 9100.32,5662.89 3279.61,5665.99 4624.61,5675.18 5854.41,5689.74 6836.03,5700.69 9296,5704 6994.68,5709.37 9725.43,5709.32 9020.08,5747.21 10091.35,5755.06 3132.59,5757.47 5927.24,5760.5 9995,5760 8881.87,5764.93 8563.4,5793.81 3629.19,5813.01 4294.78,5829.86 6992.42,5831.27 6112.55,5851.49 4630.85,5854.15 2734.3,5854.89 6710.49,5866.66 8729.48,5871.24 9224.47,5871.99 9871.24,5872.13 6215,5875 3354.75,5920.82 4922.19,5933.22 8325.5,5935.17 2492.71,5946.86 86.61,5982.2 4587.93,5984.46 6974.36,5998.31 5698.33,6026.86 8583,6032.31 3021.51,6035.17 2161.32,6040.33 10006.4,6045.83 5816.95,6051.83 4822.3,6056 2306.49,6067.74 2727.47,6093.98 3802.35,6093.98 9660.09,6111.17 9336.64,6117.71 5115.71,6137.16 4610.04,6149.64 6800.83,6157.71 4379.87,6164.54 7012.74,6196.95 10066.66,6211.25 9555.54,6225.52 7689.87,6246.18 995.25,6252.55 4298.19,6278.89 6712.62,6291.66 2414.3,6293.17 9790.23,6303.39 3824.91,6308.15 2215.92,6315.26 5810.04,6317.39 6103.45,6321.55 7898.38,6325.41 3472.06,6331.02 7066.91,6348.18 84.38,6360.34 5178.14,6372.31 2684.68,6399.63 3174.75,6399.63 828.43,6406.37 2965.66,6412.7 6883.57,6438.14 4229.58,6455.31 763.27,6464.1 3625.61,6474.77 7046.59,6481.36 8093,6490.47 4072.76,6507.59 1031.17,6516.37 5642.22,6517.96 3956.46,6534.54 74.49,6558.03 6201.38,6583.37 3862.82,6584.48 455.79,6605.69 2710.82,6615.26 4226.32,6618.67 760,6624.19 7808.76,6627.69 3249.89,6631.59 7060.28,6643.02 6989.7,6644.85 3760.85,6646.91 263.4,6653.59 6853.5,6654.95 9617.6,6654.79 2890.51,6661 5887.59,6663.27 1523.16,6665.41 10048.86,6677.66 5547.52,6714.6 5770.12,6731.75 6902.49,6737.04 7051.99,6737.04 5100.84,6744.68 3407.09,6748.26 4816.6,6764.28 9861.11,6764.1 5385.08,6774.08 8898.13,6778.47 4170.78,6788.56 624.78,6798.51 6695.68,6819.27 9425.21,6820.81 847.93,6824.5 241.31,6833.17 7617.61,6844.19 3495.3,6846.27 5536.89,6849.27 7078.83,6855.09 6870.1,6859.14 1536.87,6870 3217.6,6878.94 6084.46,6880.57 78.83,6883 6392,6888 4862.34,6894.97 6608.3,6902.81 1938.94,6920.52 5234.79,6921.1 2604.94,6921.99 5730.58,6954.42 4779.26,6955.52 1601.86,6956.66 1169.53,6966.69 9605.95,6983.83 10091.33,6984.77 6756.75,6990.29 6932.39,6991.2 9931.24,7004.37 4144.64,7040.13 7572.76,7041.03 1272.12,7043.63 3508.37,7052.1 2763.47,7058.64 3328.68,7058.64 1852.55,7061.69 1686.36,7067.15 9323.56,7072.98 6837.71,7078.41 4777.18,7080.38 6568.61,7085.88 80.99,7086.65 3047.71,7088.04 9041.88,7088.85 4957.09,7097.53 5519.17,7111.52 4440.88,7113.86 3211,7119.47 1198.9,7129.98 1450,7137.5 1376.55,7138.64 373.47,7140.81 3770,7155 3672.24,7162.97 7607.64,7183.06 7909.14,7188.04 7794.52,7190.53 4594.44,7211.88 1562.5,7225 2841.06,7242.69 63.66,7262.13 350,7262.5 3766.92,7267.62 1774.8,7269.32 1203.23,7272.96 3309.08,7274.26 3590,7280 3204.53,7280.8 5355.67,7290.29 6783.46,7291.35 8947.84,7301.68 4917.88,7303.36 1363.55,7305.46 2747.14,7306.94 5205.39,7306.62 8237.99,7309.87 8474.11,7324.55 8344.31,7327.59 5558.15,7352.51 6423.5,7391.38 1898.29,7394.94 1298.56,7396.45 387.5,7400 4496.42,7407.9 4783.93,7427.51 1427.83,7437.41 1604.03,7452.78 496.7,7460.28 5123.71,7466.71 2585.44,7470.11 2691.6,7476.61 7493.77,7501.24 6533.37,7565.03 7025.97,7575.66 65.83,7604.44 1387.38,7604.44 1725.35,7604.44 1064.58,7606.6 2689.44,7608.77 7895.49,7608.77 9518.18,7608.77 414.63,7610.94 3027.41,7610.94 4574.27,7610.94 8872.57,7610.94 9793.32,7610.94 4931.74,7613.1 5577.35,7613.1 8239.96,7613.1 8569.26,7613.1 4240.64,7615.27 6706.09,7615.27 7635.51,7615.27 9175.88,7615.27 756.93,7617.43 2331.97,7617.43 3309.05,7617.43 5265.38,7617.43 5910.99,7617.43 7000.73,7617.43 7301.87,7617.43 3930.83,7619.6 1957.17,7621.77 6292.29,7621.77 3621.02,7623.93
X10: R80.1 R81.1 U15.185 | length 361.4
  Top w8: R80.1@3230,3175 3300,3175 R81.1@3300,3170 3325.87,3195.87 U15.185@3575.69,3195.87
X11: C32.1 R81.2 U15.184 X2.1 | length 559.5
  Top w8: C32.1@3134,3376 3168,3376 3176,3368 3176,3306.68 X2.1@3177.17,3305.51 3248,3305.51 3297.51,3256 3297.51,3232.49 R81.2@3300,3230 3318.39,3211.61 U15.184@3575.69,3211.61
X20: C34.1 R82.1 U15.70 X3.1 | length 653.8
  Top w8: U15.70@4599.31,2943.9 4976.4,2943.9 R82.1@5000,2967.5 5000,2960 5060,2960 X3.1@5087.5,2987.5 5091.63,2986.96 5091.63,2960 5182.5,2960 C34.1@5182.5,2975
X21: C35.1 R82.2 U15.69 X3.2 | length 651.3
  Top w8: U15.69@4599.31,2928.15 4979.35,2928.15 R82.2@5000,2907.5 5004.5,2912 5038.28,2912 5079.31,2870.97 X3.2@5087.5,2865.45 5087.19,2865.76 5087.19,2872.81 5088,2873.61 5088,2896 5182.5,2896 C35.1@5182.5,2887.5
pads on no net: CON1.17 CON1.19 CON11.5 CON11.6 CON11.8 CON11.9 CON11.10 CON13.18 CON15.5 CON15.6 CON16.8 CON18.15 CON18.16 CON20.5 CON20.6 CON23.33 CON23.34 CON23.35 CON23.36 CON23.38 CON23.45 CON23.49 CON23.50 CON23.51 CON23.52 CON23.53 CON23.54 CON23.55 CON23.56 CON23.57 CON23.58 CON23.59 CON23.60 CON23.61 CON23.62 CON23.63 CON23.64 CON23.65 CON23.66 CON24.10 CON24.11 CON27.14 CON31.4 CON31.6 CON31.8 CON31.9 CON31.10 CON34.8 CON37.1 CON37.4 CON37.6 CON37.9 CON38.1 CON38.4 CON38.6 CON38.9 CON39.1 CON39.4 CON39.6 CON39.7 CON39.8 CON39.9 CON40.1 CON40.4 CON40.6 CON40.9 CON41.1 CON41.4 CON41.6 CON41.9 H5.1 H6.1 K1.1 K1.3 K2.2 K2.4 K3.2 K3.4 K4.2 K4.4 K5.2 K5.4 K6.2 K6.4 RN5.7 RN5.8 SW2.2 SW2.3 SW4.2 SW4.3 U1.3 U1.6 U1.9 U7.4 U7.5 U7.6 U7.11 U7.12 U7.13 U7.14 U9.3 U9.4 U9.5 U9.11 U9.14 U9.15 U9.20 U9.21 U9.22 U9.26 U9.27 U9.28 U9.33 U9.35 U9.40 U9.45 U9.46 U9.47 U11.5 U12.5 U13.4 U13.5 U13.12 U13.13 U14.1 U14.6 U14.7 U14.15 U14.16 U20.7 U20.8 U20.9 U20.10

## Polygon pours and split planes (outlines as drawn)
CDCVS on 2-GND "2-GND-CDCVS" (solid, remove dead copper, pour order 0): 37.5,5512.5 25,5500 25,4750 37.5,4737.5 1175,4737.5 1187.5,4750 1187.5,5162.5 1200,5175 1675,5175 1687.5,5187.5 1687.5,6012.5 1675,6025 1412.5,6025 1400,6012.5 1400,5862.5 1387.5,5850 925,5850 912.5,5862.5 912.5,6137.5 900,6150 537.5,6150 525,6137.5 525,5525 512.5,5512.5
VS on 2-GND "2-GND-VS" (solid, remove dead copper, pour order 4): 25,5550 37.5,5537.5 487.5,5537.5 500,5550 500,6162.5 512.5,6175 925,6175 937.5,6162.5 937.5,5887.5 950,5875 1362.5,5875 1375,5887.5 1375,6037.5 1387.5,6050 1700,6050 1712.5,6037.5 1712.5,5162.5 1700,5150 1225,5150 1212.5,5137.5 1212.5,4725 1200,4712.5 37.5,4712.5 25,4700 25,37.5 37.5,25 10200,25 10212.5,37.5 10212.5,7637.5 10200,7650 37.5,7650 25,7637.5
CDCVS on Bottom "Bottom-CDCVS" (solid, remove dead copper, pour order 2): 37.5,5512 25,5499.5 25,4750 37.5,4737.5 1175,4737.5 1187.5,4750 1187.5,5162.5 1200,5175 1675,5175 1687.5,5187.5 1687.5,6012.5 1675,6025 1412.5,6025 1400,6012.5 1400,5862.5 1387.5,5850 925,5850 912.5,5862.5 912.5,6137.5 900,6150 540.5,6150 528,6137.5 528,5524.5 515.5,5512
VS on Bottom "Bottom-VS" (solid, remove dead copper, pour order 6): 25,5550 37.5,5537.5 487.5,5537.5 500,5550 500,6162.5 512.5,6175 925,6175 937.5,6162.5 937.5,5887.5 950,5875 1362.5,5875 1375,5887.5 1375,6037.5 1387.5,6050 1700,6050 1712.5,6037.5 1712.5,5162.5 1700,5150 1225,5150 1212.5,5137.5 1212.5,4725 1200,4712.5 37.5,4712.5 25,4700 25,37.5 37.5,25 10200,25 10212.5,37.5 10212.5,7637.5 10200,7650 37.5,7650 25,7637.5
VS on Top "Top-VS" (solid, remove dead copper, pour order 8): 25,5550 37.5,5537.5 487.5,5537.5 500,5550 500,6162.5 512.5,6175 925,6175 937.5,6162.5 937.5,5887.5 950,5875 1362.5,5875 1375,5887.5 1375,6037.5 1387.5,6050 1700,6050 1712.5,6037.5 1712.5,5162.5 1700,5150 1225,5150 1212.5,5137.5 1212.5,4725 1200,4712.5 37.5,4712.5 25,4700 25,37.5 37.5,25 10200,25 10212.5,37.5 10212.5,7637.5 10200,7650 37.5,7650 25,7637.5
CDCVS on Top "Top-CDCVS" (solid, remove dead copper, pour order 10): 37.5,5512.5 25,5500 25,4750 37.5,4737.5 1175,4737.5 1187.5,4750 1187.5,5162.5 1200,5175 1675,5175 1687.5,5187.5 1687.5,6012.5 1675,6025 1412.5,6025 1400,6012.5 1400,5862.5 1387.5,5850 925,5850 912.5,5862.5 912.5,6137.5 900,6150 537.5,6150 525,6137.5 525,5525 512.5,5512.5
5VIN on 3-POWER (split plane): 1233.42,7498.31 1233.42,7300 1233.73,7298.44 1234.62,7297.12 1247.12,7284.62 1247.78,7284.17 1248.44,7283.73 1250,7283.42 2105.81,7283.42 2115.92,7273.31 2115.92,6926.69 2105.81,6916.58 1375,6916.58 1373.44,6916.27 1372.78,6915.83 1372.12,6915.38 1359.62,6902.88 1358.73,6901.56 1358.42,6900 1358.42,6676.69 1348.31,6666.58 751.69,6666.58 741.58,6676.69 741.58,7198.31 751.69,7208.42 900,7208.42 901.56,7208.73 902.88,7209.62 915.38,7222.12 915.83,7222.78 916.27,7223.44 916.58,7225 916.58,7498.31 926.69,7508.42 1223.31,7508.42
VD12 on 3-POWER (split plane): 189 vertices, not listed, extent 1516.58,2104.08 4970.92,6158.42
VIN on 3-POWER (split plane): 2120.92,7635.81 2120.92,7326.69 2110.81,7316.58 1276.69,7316.58 1266.58,7326.69 1266.58,7525 1266.27,7526.56 1265.83,7527.22 1265.38,7527.88 1252.88,7540.38 1251.56,7541.27 1250,7541.58 900,7541.58 898.44,7541.27 897.78,7540.83 897.12,7540.38 884.62,7527.88 883.73,7526.56 883.42,7525 883.42,7251.69 873.31,7241.58 725,7241.58 723.44,7241.27 722.78,7240.83 722.12,7240.38 709.62,7227.88 708.73,7226.56 708.42,7225 708.42,6650 708.73,6648.44 709.62,6647.12 722.12,6634.62 722.78,6634.17 723.44,6633.73 725,6633.42 2048.31,6633.42 2058.42,6623.31 2058.42,6476.69 2048.31,6466.58 375,6466.58 373.44,6466.27 372.78,6465.83 372.12,6465.38 359.62,6452.88 358.73,6451.56 358.42,6450 358.42,5762.5 358.73,5760.94 359.62,5759.62 372.12,5747.12 372.78,5746.67 373.44,5746.23 375,5745.92 662.5,5745.92 664.06,5746.23 665.38,5747.12 677.88,5759.62 678.33,5760.28 678.77,5760.94 679.08,5762.5 679.08,6248.31 689.19,6258.42 1460.81,6258.42 1470.92,6248.31 1470.92,5326.69 1460.81,5316.58 39.19,5316.58 29.08,5326.69 29.08,7635.81 39.19,7645.92 2110.81,7645.92
VD33 on 3-POWER (split plane): 276 vertices, not listed, extent 29.08,29.08 10208.42,7645.92

## Keep-outs
Keep-Out Layer:
  the board outline again, w10

## Other copper
Top:
  region net N16071977: 462.5,7100 437.5,7075 437.5,6900 462.5,6875 800,6875 825,6900 825,6975 800,7000 750,7000 725,7025 725,7075 700,7100 462.5,7100
3-POWER (plane layer: these items are gaps in the copper):
  region: 5 vertices and 4 holes, not listed, extent 0,0 10236.22,7677.17
  lines w8: 25,37.5 37.5,25 10200,25 10212.5,37.5 10212.5,7637.5 10200,7650 2162.5,7650 2150,7637.5 2150,6900 2137.5,6887.5 1400,6887.5 1387.5,6875 1387.5,6687.5 1400,6675 2075,6675 2087.5,6662.5 2087.5,6450 2075,6437.5 400,6437.5 387.5,6425 387.5,5781.25 400,5768.75 637.5,5768.75 650,5781.25 650,6275 662.5,6287.5 1500,6287.5 1512.5,6275 1512.5,6200 1525,6187.5 3675.5,6187.5 3688,6175 3688,5450 3687.5,5450 3687.5,5075 3700,5062.5 3950,5062.5 3962.5,5050 3962.5,4050 3975,4037.5 4987.5,4037.5 5000,4025 5000,2087.5 4987.5,2075 3000,2075 2987.5,2087.5 2987.5,2812.5 3000,2825 3325,2825 3337.5,2812.5 3337.5,2462.5 3350,2450 3831.25,2450 3843.75,2462.5 3843.75,2525 3856.25,2537.5 4587.5,2537.5 4600,2550 4600,3287.5 4587.5,3300 4462.5,3300 4450,3312.5 4450,3462.5 4462.5,3475 4600,3475 4612.5,3487.5 4612.5,3675 4600,3687.5 4125,3687.5 4112.5,3675 4112.5,3537.5 4100,3525 3825,3525 3812.5,3537.5 3812.5,3587.5 3800,3600 3725,3600 3712.5,3587.5 3712.5,2912.5 3700,2900 3462.5,2900 3450,2912.5 3450,3262.5 3437.5,3275 3100,3275 3087.5,3287.5 3087.5,4000 3100,4012.5 3475,4012.5 3487.5,4025 3487.5,4450 3475,4462.5 3025,4462.5 3012.5,4475 3012.5,5275 3000,5287.5 37.5,5287.5 25,5275 25,37.5 ; 25,5325 37.5,5312.5 1462.5,5312.5 1475,5325 1475,6250 1462.5,6262.5 687.5,6262.5 675,6250 675,5762.5 662.5,5750 375,5750 362.5,5762.5 362.5,6450 375,6462.5 2050,6462.5 2062.5,6475 2062.5,6625 2050,6637.5 725,6637.5 712.5,6650 712.5,7225 725,7237.5 875,7237.5 887.5,7250 887.5,7525 900,7537.5 1250,7537.5 1262.5,7525 1262.5,7325 1275,7312.5 2112.5,7312.5 2125,7325 2125,7637.5 2112.5,7650 37.5,7650 25,7637.5 25,5325 ; 737.5,6675 750,6662.5 1350,6662.5 1362.5,6675 1362.5,6900 1375,6912.5 2107.5,6912.5 2120,6925 2120,7275 2107.5,7287.5 1250,7287.5 1237.5,7300 1237.5,7500 1225,7512.5 925,7512.5 912.5,7500 912.5,7225 900,7212.5 750,7212.5 737.5,7200 737.5,6675 ; 1512.5,5325 1525,5312.5 3025,5312.5 3037.5,5300 3037.5,4500 3050,4487.5 3500,4487.5 3512.5,4475 3512.5,4000 3500,3987.5 3125,3987.5 3112.5,3975 3112.5,3312.5 3125,3300 3462.5,3300 3475,3287.5 3475,2937.5 3487.5,2925 3675,2925 3687.5,2937.5 3687.5,3612.5 3700,3625 3825,3625 3837.5,3612.5 3837.5,3562.5 3850,3550 4075,3550 4087.5,3562.5 4087.5,3700 4100,3712.5 4625,3712.5 4637.5,3700 4637.5,3462.5 4625,3450 4487.5,3450 4475,3437.5 4475,3337.5 4487.5,3325 4612.5,3325 4625,3312.5 4625,2525 4612.5,2512.5 3881.25,2512.5 3868.75,2500 3868.75,2437.5 3856.25,2425 3325,2425 3312.5,2437.5 3312.5,2787.5 3300,2800 3025,2800 3012.5,2787.5 3012.5,2112.5 3025,2100 4962.5,2100 4975,2112.5 4975,4000 4962.5,4012.5 3950,4012.5 3937.5,4025 3937.5,5025 3925,5037.5 3675,5037.5 3662.5,5050 3662.5,6150 3650,6162.5 1525,6162.5 1512.5,6150 1512.5,5325

## Silkscreen, mask and mechanical layers (free items; w line width, h text height)
Silkscreen Top:
  drawing of 381 lines, arcs and shapes, not listed
  text "Vin" at 752,7560 h30
  text "RTC Key" at 1735,7410 h30
  text "NANDD[0:4]" at 7616,7312 h40 r270
  text "LED1" at 350,7300 h30
  text "P_Fault" at 500,7300 h30
  text "DC-PLUG" at 62.5,7212.5 h30
  text "JTAG ICE" at 3248,7160 h40
  text "eMWP" at 4120,7160 h30
  text "SDWP" at 5616,7160 h30
  text "LED2" at 1342.25,7155.75 h30
  text "3V3" at 1542.25,7155.75 h30
  text "ICE" at 3776,7144 h40
  text "NHS-972-1-YS-1M52" at 8160,7136 h100
  text "1V2" at 1554.75,7074.5 h30
  text "LED3" at 1348.5,7068.25 h30
  text "WDTRst" at 1740,7055 h30
  text "PSL" at 7792,7012 h30
  text "SW1" at 1354.75,6987 h30
  text "VD33" at 1511,6987 h30
  text "2015,01,28 4L" at 8208,6928 h100
  text "1V8" at 2216,6920 h30 r270
  text "ICE Rst" at 2870,6840 h40
  text "5Vin" at 700,6750 h30
  text "NANDD[5:7]/Ctrl" at 7600,6744 h40 r270
  text "SPI" at 8240,6552 h40 r270
  text "VD18" at 2256,6368 h30
  text "SD Card" at 5656,6368 h40
  text "VDDC" at 580,6365 h40
  text "eMMC Card" at 4160,6328 h40
  text "LED5" at 6648,6320 h30
  text "SD_Ind" at 6800,6320 h30
  text "VDDB" at 555,6180 h40
  text "SD_In" at 4637.5,6112.5 h30 r270
  text "AUXo" at 664,6104 h30
  text "SD" at 6384,6072 h40
  text "NANDCtrl" at 7056,6040 h40 r270
  text "eMMC" at 5184,6016 h40 r270
  text "VD12" at 1574,6001 h30
  text "Left" at 9162.5,5937.5 h40
  text "Up" at 9525,5937.5 h40
  text "Right" at 9787.5,5937.5 h40
  text "SpkVD" at 70,5920 h30
  text "AUXi" at 780,5792 h30
  text "RTCVD33" at 3837.5,5762.5 h30
  text "NANDMLC" at 7687.5,5562.5 h30
  text "IIS" at 2448,5552 h30 r270
  text "Spko" at 392,5456 h40 r270
  text "CAN Bus0/1" at 5320,5456 h40 r270
  text "CAN0/1" at 6672,5408 h30 r270
  text "Enter" at 9800,5350 h40
  text "Exit" at 9162.5,5337.5 h40
  text "Dwn" at 9487.5,5337.5 h40
  text "PWM" at 4824,5256 h30
  text "AUXo" at 768,5173 h30
  text "CAN 0/1 Cfg" at 6356,5036 h40 r270
  text "Ethernet" at 1640,4880 h40
  text "PD[0:7]" at 2472,4760 h40
  text "PC[0:14]" at 3480,4760 h40
  text "EARPhone" at 352,4728 h40
  text "PB[0:15]" at 4600,4456 h40
  text "PG[4:5]" at 3976,4152 h40
  text "PJ[0:4]" at 2904,4136 h40
  text "PI[0:15]" at 5416,4096 h40 r270
  text "PE[0:15]" at 2232,4080 h40 r270
  text "PH[0:3]" at 2592,3856 h40 r270
  text "Ethernet Port" at 64,3832 h30
  text "USB" at 536,3720 h30
  text "LCD" at 8280,3456 h40 r270
  text "KPI" at 8768,3304 h40 r270
  text "PH[4:15]" at 5424,3048 h40 r270
  text "PF[0:10]" at 2232,2960 h40 r270
  text "Cfg4" at 5925,2950 h25
  text "Setting PJ[4:0]" at 6037.5,2950 h25
  text "ON" at 5950,2875 h25
  text "As GPIO pin." at 6037.5,2875 h25
  text "OFF" at 5937.5,2787.5 h25
  text "As JTAG interface." at 6037.5,2787.5 h25
  text "PG[0:3]" at 2616,2760 h40 r270
  text "USB P_Ctrl" at 1736,2712 h40 r270
  text "Cfg1" at 6862.5,2700 h25
  text "Cfg0" at 6975,2700 h25
  text "Bootting from" at 7087.5,2700 h25
  text "Cfg5" at 5925,2675 h25
  text "UART Debug Message" at 6037.5,2675 h25
  text "ON" at 6875,2625 h25
  text "ON" at 7000,2625 h25
  text "USB." at 7087.5,2625 h25
  text "ON" at 5937.5,2600 h25
  text "Output turn ON." at 6037.5,2600 h25
  text "ON" at 6875,2550 h25
  text "OFF" at 6987.5,2550 h25
  text "eMMC Flash." at 7087.5,2550 h25
  text "OFF" at 5937.5,2512.5 h25
  text "Output turn OFF." at 6037.5,2512.5 h25
  text "USB miniAB RECEP." at 40,2480 h30
  text "NAND Flash." at 7087.5,2475 h25
  text "OFF" at 6875,2462.5 h25
  text "ON" at 7000,2462.5 h25
  text "OFF" at 6875,2387.5 h25
  text "OFF" at 6987.5,2387.5 h25
  text "SPI Flash." at 7087.5,2387.5 h25
  text "ADC[0:7]" at 5424,2288 h40 r270
  text "Cfg2" at 6862.5,2212.5 h25
  text "System Clock from" at 6975,2212.5 h25
  text "USB P_Ind" at 1740,2204 h40 r270
  text "Cfg[0:4]" at 6728,2200 h40 r270
  text "ON" at 6875,2137.5 h25
  text "12MHz crystal." at 6975,2137.5 h25
  text "OFF" at 6862.5,2062.5 h25
  text "UPLL output." at 6987.5,2062.5 h25
  text "PF[11:14]" at 3112,2048 h30
  text "EBI" at 10136,1856 h40 r270
  text "Cfg3" at 6862.5,1850 h25
  text "Watch Dog Setting" at 6975,1850 h25
  text "Cfg7" at 5387.5,1825 h25
  text "Cfg6" at 5500,1825 h25
  text "NAND Flash Pagesize" at 5625,1825 h25
  text "OFF after power on." at 6975,1775 h25
  text "ON" at 6875,1762.5 h25
  text "ON" at 5400,1750 h25
  text "ON" at 5512.5,1750 h25
  text "2KB" at 5625,1750 h25
  text "OFF" at 6875,1700 h25
  text "ON after power on." at 6975,1700 h25
  text "ON" at 5400,1675 h25
  text "OFF" at 5512.5,1675 h25
  text "4KB" at 5625,1675 h25
  text "Cfg[5:9]" at 6736,1632 h40 r270
  text "OFF" at 5400,1600 h25
  text "ON" at 5512.5,1600 h25
  text "8KB" at 5625,1600 h25
  text "SIM Card" at 1664,1576 h40 r270
  text "SIM CARD SLOT" at 120,1552 h40 r270
  text "Ethernet" at 2200,1552 h40 r270
  text "OFF" at 5400,1525 h25
  text "OFF" at 5512.5,1525 h25
  text "None" at 5625,1525 h25
  text "PG[6:9]" at 3160,1480 h30
  text "PD[8:15]" at 3720,1480 h30
  text "PA[0:15]" at 4672,1480 h30
  text "PG[10:14]" at 2488,1456 h30
  text "Cfg9" at 5387.5,1412.5 h25
  text "Cfg8" at 5500,1412.5 h25
  text "NAND Flash ECC type" at 5625,1412.5 h25
  text "ON" at 5400,1337.5 h25
  text "ON" at 5512.5,1337.5 h25
  text "BCH T12." at 5625,1337.5 h25
  text "ON" at 5400,1262.5 h25
  text "OFF" at 5512.5,1262.5 h25
  text "BCH T15." at 5625,1262.5 h25
  text "OFF" at 5400,1187.5 h25
  text "ON" at 5512.5,1187.5 h25
  text "BCH T24." at 5625,1187.5 h25
  text "OFF" at 5400,1112.5 h25
  text "OFF" at 5512.5,1112.5 h25
  text "None" at 5625,1112.5 h25
  text "UART2" at 3024,904 h40 r270
  text "UART1" at 2200,888 h40 r270
  text "UART0" at 4688,880 h40 r270
  text "UART3" at 6880,832 h30 r270
  text "UART4" at 8062.5,800 h40 r270
  text "UART1" at 760,528 h40
  text "UART0" at 4024,520 h40
  text "UART3" at 5712,520 h40
  text "UART4" at 7392,520 h40
  text "UART2" at 2456,512 h40
Silkscreen Bottom:
  lines w8: 3996,2528 3844,2528 3844,2856 3976,2856 3976,2528 3996,2528 ; 3996,2528 3996,2232 4160,2232 4160,2424 3996,2424 3996,2528 ; 3688,2728 3688,3100 3880,3100 3880,2952 3840,2952 3840,2728 3688,2728
Solder Mask Top:
  region: 3906.25,3375 3906.25,2912 4287.5,2912 4287.5,3375 3906.25,3375
Solder Mask Bottom:
  region: 3906.25,3375 3906.25,2912 4287.5,2912 4287.5,3375 3906.25,3375
Drill Drawing:
  lines w1: 0,7677.17 0.03,7677.17 ; 10236.22,7677.17 10236.25,7677.17 ; 10354.33,0 10354.36,0 ; 10354.33,7677.17 10354.36,7677.17
  lines w10: 0,7727.17 0,7875 ; 4881.29,7825 0,7825 ; 5354.93,7825 10236.22,7825 ; 10236.22,7727.17 10236.22,7875 ; 10404.33,0 10561.81,0 ; 10404.33,7677.17 10561.81,7677.17 ; 10511.81,3590.29 10511.81,0 ; 10511.81,4045.75 10511.81,7677.17 ; 0,7825 100,7850 100,7800 0,7825 ; 10236.22,7825 10136.22,7800 10136.22,7850 10236.22,7825 ; 10511.81,0 10486.81,100 10536.81,100 10511.81,0 ; 10511.81,7677.17 10536.81,7577.17 10486.81,7577.17 10511.81,7677.17
  text "260.00mm" at 4911.29,7787.5 h50
  text "195.00mm" at 10472.44,4015.75 h50 r270
Layer_19:
  lines w10: 8346.06,-12.4 8346.06,5784.65 ; 2512.5,1812.5 2512.5,4812.5 5512.5,4812.5 5512.5,1812.5 2512.5,1812.5